# Altium PCB MCU-AD-20130721.PcbDoc
Units mil, origin at the board's own origin, x right, y up, seen from the top; angles counter-clockwise.
Board outline 3680 x 2640 mil, 2 copper layers (Top Layer, Bottom Layer); 104 components, 83 nets, 414 pads, 46 vias.
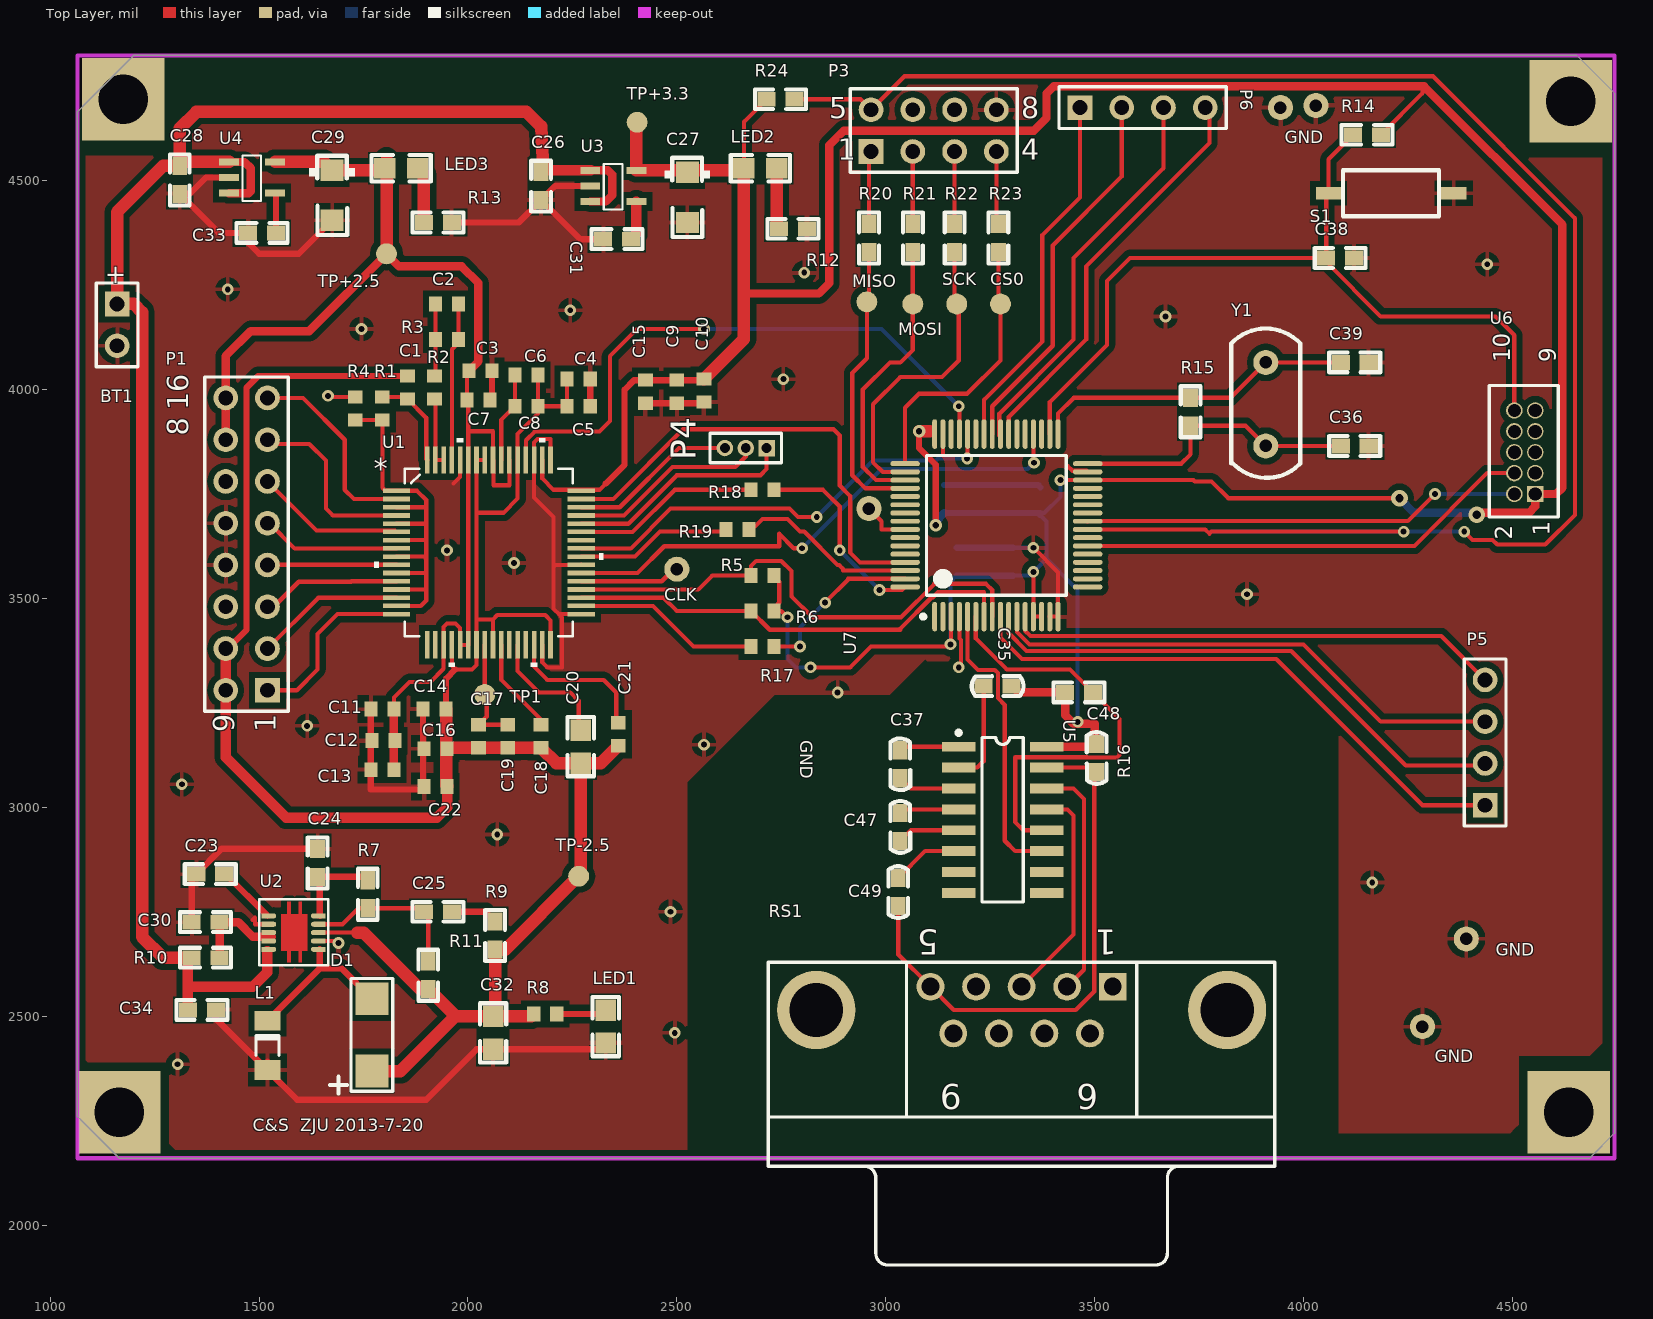
[diagram p0: Top Layer view]
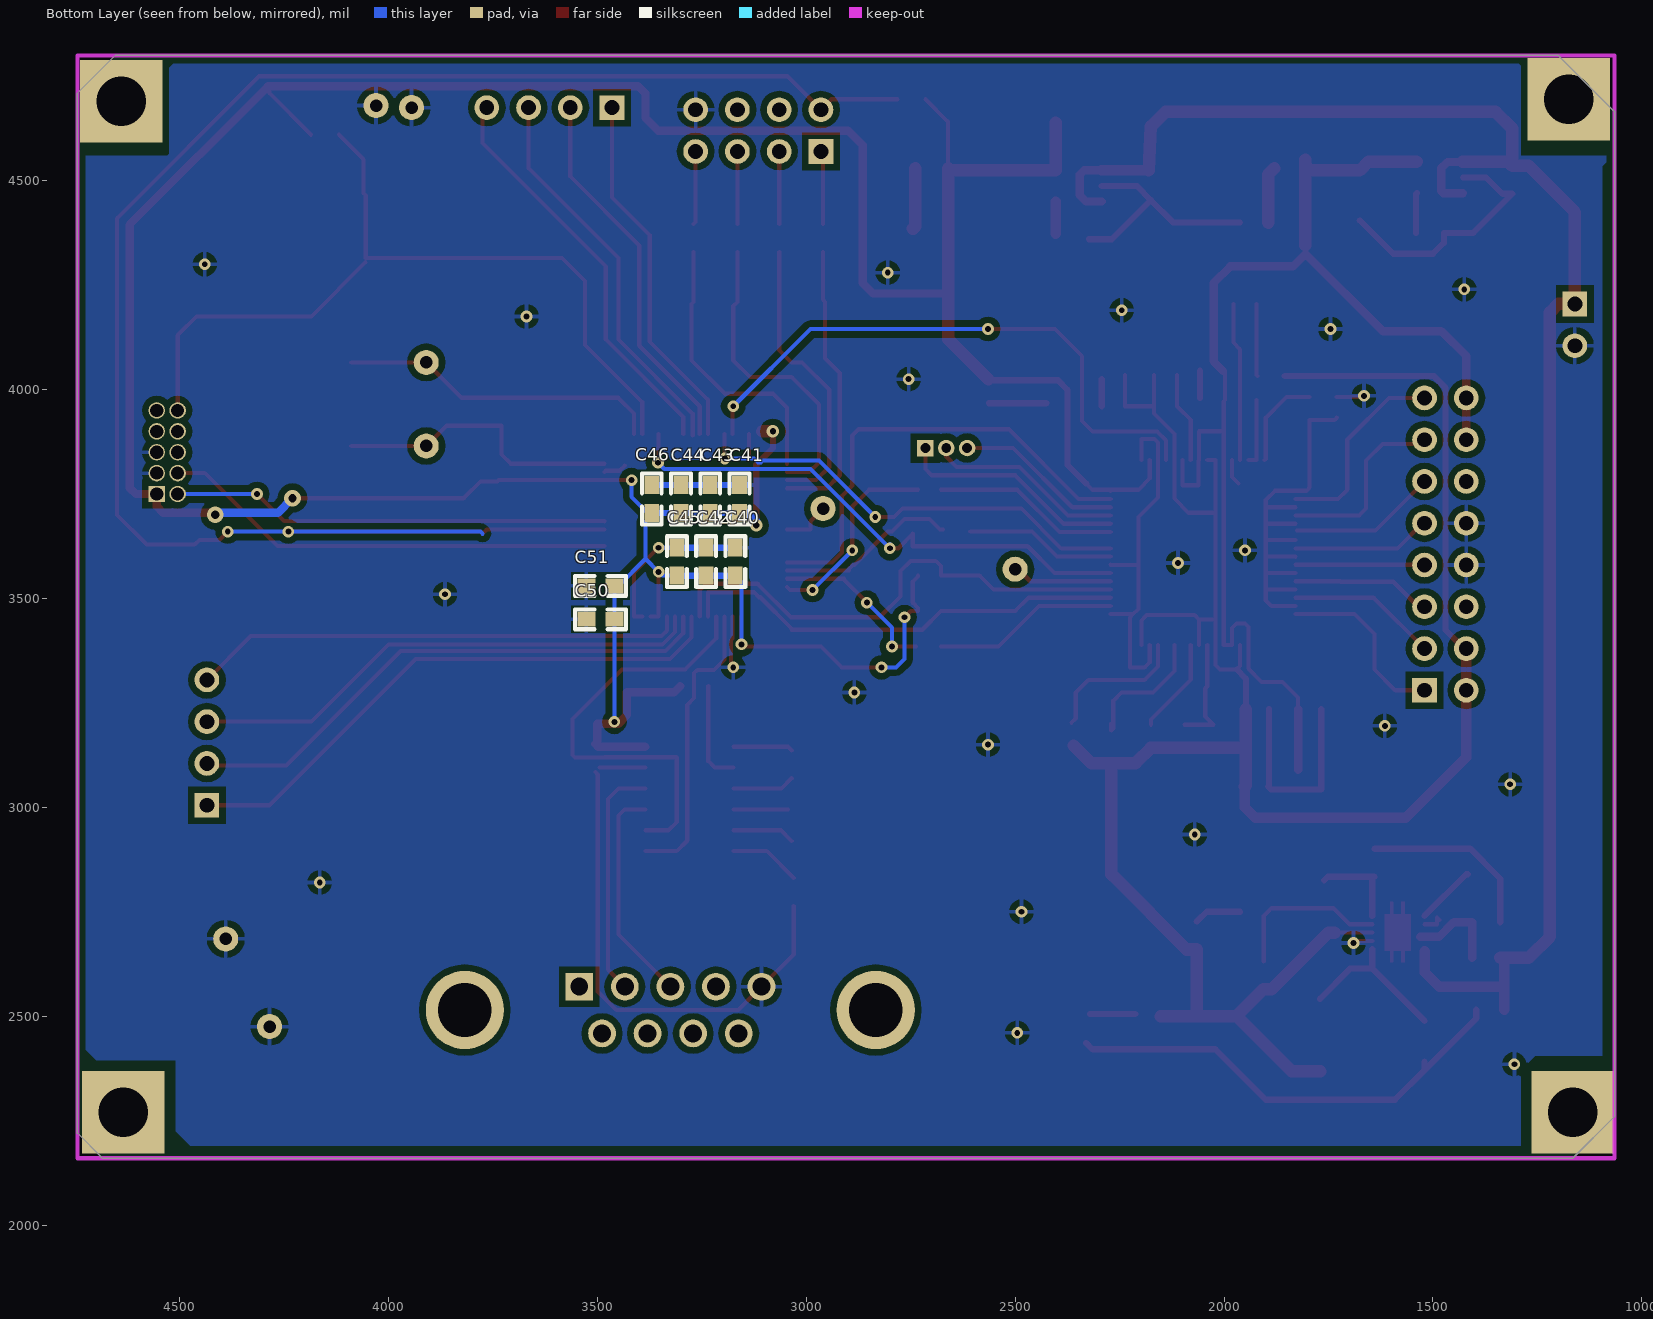
[diagram p1: Bottom Layer view, seen from below]

## Layer stack, top to bottom
Top Layer: signal copper 1.4
Dielectric: dielectric 12.6, FR-4, Dk 4.8
Bottom Layer: signal copper 1.4

## Board outline
1165,2160 1065,2260 1065,4665 1200,4800 4655,4800 4745,4710 4745,2220 4685,2160

## Design rules (kind name [scope] priority, off if disabled: settings)
Clearance [All] p1: gap=6
HoleSize [All] p1: absolutevalues=TRUE maxlimit=200 minlimit=1 maxpercent=80.000 minpercent=20.000
MinimumSolderMaskSliver [All] p1: minsoldermaskwidth=0
PolygonConnect [All] p1: connectstyle=Relief reliefconductorwidth=10 reliefentries=4 polygonreliefangle="90 Angle"
RoutingVias [All] p1: holewidth=14 width=28 viastyle="Through Hole" minholewidth=10 minwidth=20 maxholewidth=30 maxwidth=60
SilkToSilkClearance [All] p1: silktosilkclearance=6
SilkscreenOverComponentPads [All] p1: minsilkscreentomaskgap=0
SolderMaskExpansion [All] p1: expansion=4
Width [All] p1: maxlimit=60 minlimit=8 preferedwidth=10 minimp=50.000000 maximp=50.000000 favimp=50.000000
24 further rules are at their usual default settings.

## Classes and differential pairs
component class AD: C1 C2 C3 C4 C5 C6 C7 C8 C9 C10 C11 C12 C13 C14 C15 C16 C17 C18 C19 C20 C21 C22 P1 P4 R1 R2 R3 R4 R5 R6 TP1 U1
component class MCU: BT1 C23 C24 C25 C26 C27 C28 C29 C30 C31 C32 C33 C34 C35 C36 C37 C38 C39 C40 C41 C42 C43 C44 C45 C46 C47 C48 C49 C50 C51 CS0 D1 L1 LED1 LED2 LED3 P3 P5 P6 R7 R8 R9 R10 R11 R12 R13 R14 R15 R16 R17 R18 R19 R20 R21 R22 R23 R24 RS1 S1 TP+2.5 TP+3.3 TP-2.5 U2 U3 U4 U5 U6 U7 Y1

## Components (designator, comment, footprint, x,y, rotation, side; value= is the part's Value field where it differs from the comment)
BT1 "Battery" BAT-2 1160,4155 r270 top
C1 "Cap" 1608[0603] 1855,4005 r90 top
C2 "Cap" 1608[0603] 1950,4205 r180 top
C3 "Cap" 1608[0603] 2030,4045 r0 top
C4 "Cap" 1608[0603] 2265,4025 r0 top
C5 "Cap" 1608[0603] 2265,3960 r0 top
C6 "Cap" 1608[0603] 2140,4035 r0 top
C7 "Cap" 1608[0603] 2025,3975 r0 top
C8 "Cap" 1608[0603] 2140,3960 r0 top
C9 "Cap" 1608[0603] 2500,3995 r270 top
C10 "Cap" 1608[0603] 2565,3997.44 r270 top
C11 "Cap" 1608[0603] 1795,3235 r0 top
C12 "Cap" 1608[0603] 1797.44,3160 r0 top
C13 "Cap" 1608[0603] 1795,3090 r0 top
C14 "Cap" 1608[0603] 1920,3235 r0 top
C15 "Cap" 1608[0603] 2425,3995 r270 top
C16 "Cap" 1608[0603] 1922.44,3140 r0 top
C17 "Cap" 1608[0603] 2025,3170 r90 top
C18 "Cap" 1608[0603] 2175,3170 r90 top
C19 "Cap" 1608[0603] 2095,3170 r90 top
C20 "Cap" 0805 2270,3145 r90 top
C21 "Cap" 1608[0603] 2360,3175 r90 top
C22 "Cap" 1608[0603] 1922.44,3050 r0 top
C23 "4.7nF" 0603 1385,2840 r0 top
C24 "0.22uF" 0603 1640,2865 r270 top
C25 "10pF" 0603 1930,2750 r0 top
C26 "0.1uF" 0603 2175,4485 r270 top
C27 "10uF" CAP-A 2525,4520 r270 top
C28 "0.1uF" 0603 1310,4500 r270 top
C29 "10uF" CAP-A 1675,4525 r270 top
C30 "0.1uF" 0603 1370,2725 r180 top
C31 "0.1uF" 0603 2355,4360 r180 top
C32 "22uF" 0805 2060,2460 r90 top
C33 "0.1uF" 0603 1505,4375 r180 top
C34 "10uF" 0603 1365,2515 r0 top
C35 "CAP" 0603_CAP 3270,3290 r0 top
C36 "CAP" 0603 4125,3865 r0 top
C37 "CAP" 0603_CAP 3035,3105 r90 top
C38 "CAP" 0603 4090,4315 r0 top
C39 "CAP" 0603 4125,4065 r0 top
C40 "CAP" 0603 3170,3590 r90 bottom
C41 "CAP" 0603 3160,3740 r90 bottom
C42 "CAP" 0603 3240,3590 r90 bottom
C43 "CAP" 0603 3230,3740 r90 bottom
C44 "CAP" 0603 3300,3740 r90 bottom
C45 "CAP" 0603 3310,3590 r90 bottom
C46 "CAP" 0603 3370,3740 r90 bottom
C47 "CAP" 0603_CAP 3035,2955 r90 top
C48 "CAP" 0603_CAP 3505,3120 r90 top
C49 "CAP" 0603_CAP 3030,2795 r270 top
C50 "CAP" 0603 3495,3450 r0 bottom
C51 "CAP" 0603 3495,3530 r0 bottom
CS0 "Test_Point" TP_PAD 3275,4205 r90 top (schematic designator TP6)
D1 "SL02（小信号肖特基二极管）" Diode_NOMAL 1770,2455 r90 top
L1 "Inductor" INDC3216-1206 1520,2430 r270 top
LED1 "LED0" 0805 2330,2475 r90 top
LED2 "Green" 0805 2700,4530 r0 top
LED3 "Green" 0805 1840,4530 r0 top
MISO "Test_Point" TP_PAD 2955,4210 r90 top (schematic designator TP3)
MOSI "Test_Point" TP_PAD 3065,4205 r90 top (schematic designator TP4)
P1 "P-220" HDR2X8_CEN 1520,3280 r90 top
P3 "Header 4X2A" HDR2X4_CEN 2965,4570 r0 top
P4 "MHDR1X3" MHDR1X3 2715,3860 r180 top
P5 "Header 4" HDR1X4 4435,3005 r90 top
P6 "Header 4" HDR1X4 3465,4675 r0 top
R1 "Res1" 1608[0603] 1795,3955 r90 top
R2 "Res1" 1608[0603] 1920,4005 r90 top
R3 "Res1" 1608[0603] 1950,4120 r180 top
R4 "Res1" 1608[0603] 1730,3955 r270 top
R5 "Res1" 1608[0603] 2705,3555 r0 top
R6 "Res1" 1608[0603] 2705,3470 r0 top
R7 "Res2" 0603 1760,2790 r270 top
R8 "Res1" 1608[0603] 2185,2505 r0 top
R9 "Res2" 0603 2065,2695 r90 top
R10 "Res2" 0603 1370,2640 r180 top
R11 "Res2" 0603 1905,2600 r90 top
R12 "Res2" 0603 2780,4385 r0 top
R13 "Res2" 0603 1930,4400 r0 top
R14 "RES" 0603 4150,4610 r180 top
R15 "RES" 0603 3730,3945 r270 top
R16 "10K" 0603 3465,3275 r0 top
R17 "Res1" 1608[0603] 2705,3385 r0 top
R18 "Res1" 1608[0603] 2705,3760 r0 top
R19 "Res1" 1608[0603] 2645,3665 r0 top
R20 "RES" 0603 2960,4365 r90 top
R21 "RES" 0603 3065,4365 r90 top
R22 "RES" 0603 3165,4365 r90 top
R23 "RES" 0603 3270,4365 r90 top
R24 "RES" 0603 2750,4695 r0 top
RS1 "RS232" RS232 3305,2255 r270 top
S1 "RESET" button 4210,4470 r180 top
SCK "Test_Point" TP_PAD 3170,4205 r90 top (schematic designator TP5)
TP1 "Test_Point" TP_PAD 2040,3270 r90 top
TP+2.5 "Test_Point" TP_PAD 1805,4325 r90 top
TP+3.3 "Test_Point" TP_PAD 2405,4640 r90 top
TP-2.5 "Test_Point" TP_PAD 2265,2835 r90 top
U1 "ADS1198_PAG_64" PAG64 2050,3610 r0 top
U2 "tps63700" QFN10 1520,2660 r90 top
U3 "SPX3819_3.3v" SOT-23-G5 2340,4490 r0 top
U4 "SPX3819_2.5v" SOT-23-G5 1475,4510 r0 top
U5 "SP232A" D016 3280,2970 r270 top
U6 "SWD CONNECTOR" "SWD CONNECTOR" 4550,3765 r90 top
U7 "K15-64pin" LQFP64_N 3265,3675 r90 top
Y1 "8M" BCY-W2 3910,3965 r180 top

## Footprints (in the part's own frame and the unit in brackets; to place one, negate y for a bottom-side part, rotate by r counter-clockwise, add the part's x,y. Pads: shape width x height; smd on the part's side, far side on the other; paste and mask are expansions set on the pad)
0603 [mm]
  rect 1.1x0.9 smd: 1(-0.9,0) 2(0.8,0)
  silkscreen extent -1.6,-0.6 1.5,0.6
0603_CAP [mm]
  rect 1.1x0.9 smd: 1(-0.9,0) 2(0.8,0)
  silkscreen extent -1.62,-0.6 1.52,0.6
0805 [mm]
  rect 1.3x1.25 smd: 1(-1,0) 2(1,0)
  silkscreen extent -1.8,-0.8 1.8,0.8
1608[0603] [mm] "Chip Capacitor, Body 1.6x0.8mm, IPC High Density"
  rect 0.8x0.9 smd: 1(-0.7,0) 2(0.7,0)
  body extent -0.87,-0.48 0.87,0.48, height 1.3
BAT-2 [mm] "Multicell Battery; 2 Leads"
  rect 1.5x1.5 hole 0.9: 1(-1.27,0)
  round 1.5 hole 0.9: 2(1.27,0)
  silkscreen extent -2.54,-1.27 2.54,1.27
BCY-W2 [mil]
  round 60 hole 30: 1(0,-100) 2(0,100)
  silkscreen extent -83,-181 83,176
button [mil]
  rect 60x30 smd: 1(150,0) 2(-150,0)
  silkscreen extent -115,-55 115,55
CAP-A [mm]
  rect 1.3x1.4 smd: 1(0,0) 2(3.048,0)
  silkscreen extent -0.89,-1.4 3.94,1.4
D016 [mm]
  rect 0.6x2.05 smd: 1(-4.445,-2.675) 2(-3.175,-2.675) 3(-1.905,-2.675) 4(-0.635,-2.675) 5(0.635,-2.675) 6(1.905,-2.675) 7(3.175,-2.675) 8(4.445,-2.675) 9(4.445,2.675) 10(3.175,2.675) 11(1.905,2.675) 12(0.635,2.675) 13(-0.635,2.675) 14(-1.905,2.675) 15(-3.175,2.675) 16(-4.445,2.675)
  silkscreen extent -5.42,-2.8 5,1.25
Diode_NOMAL [mm]
  rect 2x2 smd: 1(-2.2,-0.002) 2(2.2,-0.002)
  silkscreen extent -3.56,-1.27 3.43,2.54
HDR1X4 [mm] "Connector; Header; 4 Position"
  rect 1.5x1.5 hole 0.9: 1(0,0)
  round 1.5 hole 0.9: 2(2.54,0) 3(5.08,0) 4(7.62,0)
  silkscreen extent -1.27,-1.27 8.89,1.27
HDR2X4_CEN [mm] "Connector; Header; 4x2 Position"
  rect 1.5x1.5 hole 0.9: 1(0,0)
  round 1.5 hole 0.9: 2(2.54,0) 3(5.08,0) 4(7.62,0) 5(0,2.54) 6(2.54,2.54) 7(5.08,2.54) 8(7.62,2.54)
  silkscreen extent -1.27,-1.27 8.89,3.81
HDR2X8_CEN [mm]
  rect 1.5x1.5 hole 0.9: 1(0,0)
  round 1.5 hole 0.9: 2(2.54,0) 3(5.08,0) 4(7.62,0) 5(10.16,0) 6(12.7,0) 7(15.24,0) 8(17.78,0) 9(0,2.54) 10(2.54,2.54) 11(5.08,2.54) 12(7.62,2.54) 13(10.16,2.54) 14(12.7,2.54) 15(15.24,2.54) 16(17.78,2.54)
  silkscreen extent -1.27,-1.27 19.05,3.81
INDC3216-1206 [mm] "3216 Chip; Chip Inductor; Body 3.2 x 1.6 mm (LxW typ)"
  rect 1.2x1.6 smd: 1(-1.5,0) 2(1.5,0)
  silkscreen extent -0.6,-0.7 0.6,0.7
LQFP64_N [mm] "Thin QFP, 64-Leads, Body 10x10mm, Pitch 0.5mm, IPC Medium Density"
  oval 1.8x0.3 smd: 1(-5.55,3.75) 2(-5.55,3.25) 3(-5.55,2.75) 4(-5.55,2.25) 5(-5.55,1.75) 6(-5.55,1.25) 7(-5.55,0.75) 8(-5.55,0.25) 9(-5.55,-0.25) 10(-5.55,-0.75) 11(-5.55,-1.25) 12(-5.55,-1.75) 13(-5.55,-2.25) 14(-5.55,-2.75) 15(-5.55,-3.25) 16(-5.55,-3.75) 33(5.55,-3.75) 34(5.55,-3.25) 35(5.55,-2.75) 36(5.55,-2.25) 37(5.55,-1.75) 38(5.55,-1.25) 39(5.55,-0.75) 40(5.55,-0.25) 41(5.55,0.25) 42(5.55,0.75) 43(5.55,1.25) 44(5.55,1.75) 45(5.55,2.25) 46(5.55,2.75) 47(5.55,3.25) 48(5.55,3.75)
  oval 0.3x1.8 smd: 17(-3.75,-5.55) 18(-3.25,-5.55) 19(-2.75,-5.55) 20(-2.25,-5.55) 21(-1.75,-5.55) 22(-1.25,-5.55) 23(-0.75,-5.55) 24(-0.25,-5.55) 25(0.25,-5.55) 26(0.75,-5.55) 27(1.25,-5.55) 28(1.75,-5.55) 29(2.25,-5.55) 30(2.75,-5.55) 31(3.25,-5.55) 32(3.75,-5.55) 49(3.75,5.55) 50(3.25,5.55) 51(2.75,5.55) 52(2.25,5.55) 53(1.75,5.55) 54(1.25,5.55) 55(0.75,5.55) 56(0.25,5.55) 57(-0.25,5.55) 58(-0.75,5.55) 59(-1.25,5.55) 60(-1.75,5.55) 61(-2.25,5.55) 62(-2.75,5.55) 63(-3.25,5.55) 64(-3.75,5.55)
  silkscreen extent -5.67,-4.25 4.25,4.57, body extent -5,-5 5,5, height 1.6
MHDR1X3 [mm] "Connector; Header; 3 Position"
  rect 1x1 hole 0.6: 1(0,0)
  round 1 hole 0.6: 2(1.27,0) 3(2.54,0)
  silkscreen extent -0.9,-0.9 3.44,0.9
PAG64 [mil]
  rect 65.5x11 smd: 1(-221.25,147.64) 2(-221.25,127.95) 3(-221.25,108.27) 4(-221.25,88.58) 5(-221.25,68.9) 6(-221.25,49.21) 7(-221.25,29.53) 8(-221.25,9.84) 9(-221.25,-9.84) 10(-221.25,-29.53) 11(-221.25,-49.21) 12(-221.25,-68.9) 13(-221.25,-88.58) 14(-221.25,-108.27) 15(-221.25,-127.95) 16(-221.25,-147.64) 33(221.25,-147.64) 34(221.25,-127.95) 35(221.25,-108.27) 36(221.25,-88.58) 37(221.25,-68.9) 38(221.25,-49.21) 39(221.25,-29.53) 40(221.25,-9.84) 41(221.25,9.84) 42(221.25,29.53) 43(221.25,49.21) 44(221.25,68.9) 45(221.25,88.58) 46(221.25,108.27) 47(221.25,127.95) 48(221.25,147.64)
  rect 11x65.5 smd: 17(-147.64,-221.25) 18(-127.95,-221.25) 19(-108.27,-221.25) 20(-88.58,-221.25) 21(-68.9,-221.25) 22(-49.21,-221.25) 23(-29.53,-221.25) 24(-9.84,-221.25) 25(9.84,-221.25) 26(29.53,-221.25) 27(49.21,-221.25) 28(68.9,-221.25) 29(88.58,-221.25) 30(108.27,-221.25) 31(127.95,-221.25) 32(147.64,-221.25) 49(147.64,221.25) 50(127.95,221.25) 51(108.27,221.25) 52(88.58,221.25) 53(68.9,221.25) 54(49.21,221.25) 55(29.53,221.25) 56(9.84,221.25) 57(-9.84,221.25) 58(-29.53,221.25) 59(-49.21,221.25) 60(-68.9,221.25) 61(-88.58,221.25) 62(-108.27,221.25) 63(-127.95,221.25) 64(-147.64,221.25)
  silkscreen extent -274,-274 274,274
QFN10 [mil]
  round 11.98 smd mask+0: 1(80,-15) 2(60,-15) 3(40,-15) 4(20,-15) 5(0,-15) 6(0,-110) 7(20,-110) 8(40,-110) 9(60,-110) 10(80,-110)
  rect 12x28 smd mask+0: 1(80,0) 2(60,0) 3(40,0) 4(20,0) 5(0,0) 6(0,-125) 7(20,-125) 8(40,-125) 9(60,-125) 10(80,-125)
  Top Layer region: 78.5,-83 114,-83 114,-74 78.5,-74
  Top Layer region: -31.5,-83 5,-83 5,-74 -31.5,-74
  Top Layer region: -4,-96 84,-96 84,-32 -4,-32
  Top Layer region: 83,-56 114,-56 114,-47 83,-47
  Top Layer region: -31.5,-56 5,-56 5,-47 -31.5,-47
  silkscreen extent -38,-145 120,20
RS232 [mm]
  rect 1.69x1.69 hole 1.09: 1(-8.014,6.059)
  round 1.69 hole 1.09: 2(-8.014,3.289) 3(-8.014,0.519) 4(-8.014,-2.251) 5(-8.014,-5.021) 6(-5.174,4.674) 7(-5.174,1.904) 8(-5.174,-0.866) 9(-5.174,-3.636)
  round 4.76 hole 3.26: 10(-6.594,13.014) 11(-6.594,-11.976)
  silkscreen extent -9.49,-14.88 8.91,15.92
SOT-23-G5 [mil]
  rect 47.24x16.9 smd: 1(-47,35) 2(-47,-2.4) 3(-47,-39.8) 4(63.24,-39.8) 5(63.24,35)
  silkscreen extent -15,-59 30,50
"SWD CONNECTOR" [mm]
  rect 1x1 hole 0.8: 1(-0.381,-0.127)
  round 1 hole 0.8: 2(-0.381,1.143) 3(0.889,-0.127) 4(0.889,1.143) 5(2.159,-0.127) 6(2.159,1.143) 7(3.429,-0.127) 8(3.429,1.143) 9(4.699,-0.127) 10(4.699,1.143)
  silkscreen extent -1.78,-1.52 6.22,2.67
TP_PAD [mil] "For Test Point"
  round 50 smd: 0(0,0)

## Part data
BT1: "Multicell Battery"
C1 C2 C3 C4 C5 C6 C7 C8 C9 C10 C11 C12 C13 C14 C15 C16 C17 C18 C19 C20 C21 C22: "Capacitor"
C23 C24 C25 C26 C28 C30 C31 C32 C33 C34: library part CAP
C27 C29: library part "CAP POL3"
D1: library part Diode, "Default Diode"
LED1: "Typical INFRARED GaAs LED"
LED2 LED3: library part LED
P1: library part "Header 8X2A", "Header, 8-Pin, Dual row"
P3: "Header, 4-Pin, Dual row"
P4: "Header, 3-Pin"
P5 P6: "Header, 4-Pin"
R1 R2 R3 R4 R5 R6 R7 R8 R9 R10 R11 R12 R13 R17 R18 R19: "Resistor"
R16: library part RES
S1: library part SW-PB
U1: "Imported"
U3 U4: library part SPX3819
Y1: library part XTAL_2

## Free pads (board coordinates)
  round 60 hole 30: 0(4285,2475) 1(4390,2685) 2(3945,4675) 3(4030,4680) 4(2500,3570) 5(2960,3715)
  rect 196.85x196.85 hole 118.11: 2(1165,2270) 2(1175,4695) 2(4635,2270) 2(4640,4690)

## Via types
v1: diameter 28, hole 14, Top Layer to Bottom Layer, 42 vias
v2: diameter 30, hole 15, Top Layer to Bottom Layer, 2 vias
v3: diameter 40, hole 20, Top Layer to Bottom Layer, 2 vias

## Nets (pads, with @x,y where several pads share a name; then routed paths per layer and width w, separated by ;. In a path a pad name is that pad's centre, name@x,y a point inside that pad or via, vN(x,y) a via of type N, cw(c..) or ccw(c..) an arc to the next point about the centre after c; other vN are vias at no path point)
+2.5V: C3.1 C7.1 C11.2 C12.2 C13.2 C29.1 LED3.1 P1.15 P1.16 TP+2.5.0 U1.19 U1.21 U1.22 U1.54 U1.56 U1.59 U4.5 | length 3108.2
  Top Layer w10: C11.2 1822.56,3262.56 1860,3300 1910,3300 1941.73,3331.73 U1.19 1941.73,3431.73 1950,3440 1970,3440 1981.1,3428.9 U1.21 U1.22 U1.59 2000.79,3901.45 ; C3.1@1997.44,4040 C7.1 2000.79,3971.65 2000.79,3901.45 ; U1.54 2099.21,3770.79 2060.79,3770.79 2060.79,3830.31 U1.56 2059.84,3900.16 2002.08,3900.16 2000.79,3901.45
  Top Layer w20: P1.15 P1.16 1420,4080 1480,4140 1620,4140 TP+2.5.0 1835,4295 1985,4295 2025,4255 2025,4067.56 C3.1 ; C13.2 C11.2
  Top Layer w30: U4.5 1655,4545 C29.1 1795.63,4525 LED3.1 1800,4530.63 LED3.1@1800,4525 ; TP+2.5.0@1805,4345 LED3.1@1805,4550.63
+3.3V: C9.1 C10.1 C15.1 C27.1 C35.2 C40.1 C41.1 C42.1 C43.1 C44.1 C45.1 C46.1 C48.2 C50.1 C51.1 LED2.1 R5.2 R6.2 R14.1 R16.1 R24.1 TP+3.3.0 U1.48 U1.50 U3.5 U5.16 U6.1 U7.3 U7.13 U7.14 U7.30 U7.48 | length 9233.3
  Top Layer w10: U1.50 2177.95,3787.05 2205,3760 U1.48@2268.89,3760 ; U1.48 U1.48@2268.89,3760 ; 2330,3775 2315,3760 U1.48@2268.89,3760 ; LED2.1 2660.63,4641.06 R24.1 ; R5.2 2732.56,3552.56 2745,3540.12 2745,3489.88 2732.56,3477.44 R6.2 2750,3470 v1(2765,3455) ; v1(2820,3335) 2915,3335 2965,3385 3150,3385 v1(3155,3390) 3156.73,3391.73 U7.3 ; v1(3353.58,3563.58) U7.13 U7.14 ; v1(3418.27,3783.27) U7.30 3736.73,3783.27 3740,3780 3780,3780 3820,3740 v3(4230,3740) ; R14.1 4285,4709.57 4285,4722
  Top Layer w15: 2330,3775 2375,3820 2375,4000 2397.56,4022.56 C15.1 C9.1 2562.56,4022.56 C10.1 ; v2(3080,3900) 3080,3860 3120,3820 v2(3120,3675)
  Top Layer w20: 2660.63,4230 2840,4230 2865,4255 2865,4585 2900,4620 3355,4620 3385,4650 3385,4709 3402,4726 4289,4726 4620,4395 4620,3765 4605,3750 U6.1 4555,3720 4540,3705 4420,3705 v3(4415,3700) ; C35.2 3316.5,3275 R16.1 3429.57,3220.43 3450,3200 3500.43,3200 3500.43,3156.06 C48.2 3498.5,3145 U5.16
  Top Layer w30: TP+3.3.0@2403.24,4638.24 U3.5 LED2.1@2655.63,4525 ; C10.1 2660.63,4120.63 2660.63,4230 LED2.1 ; v2(3080,3900) 3105,3900
  Bottom Layer w10: v1(2765,3455) 2765,3355 2785,3335 v1(2820,3335) ; v1(3155,3390) 3155,3539.57 C40.1 ; C45.1@3305,3554.57 C45.1 3344.57,3554.57 v1(3353.58,3563.58) 3385,3595 ; C46.1@3365,3704.57 C46.1 3379.57,3704.57 3418.27,3743.27 v1(3418.27,3783.27) ; C46.1@3370,3699.57 3385,3684.57 3385,3595 ; v1(3459.57,3204.57) C50.1 C51.1 3450,3530 3385,3595
  Bottom Layer w15: 3140,3704.57 3365,3704.57 3370,3699.57 C46.1 ; C40.1 C42.1 C45.1@3305,3554.57
  Bottom Layer w20: v2(3120,3675) 3120,3684.57 3140,3704.57 ; v3(4230,3740) 4265,3705 4410,3705 v3(4415,3700)
-2.5V: C1.2 C4.1 C5.1 C6.2 C8.2 C14.2 C16.2 C17.1 C18.1 C19.1 C20.1 C21.1 C22.2 C32.2 D1.1 P1.9 P1.10 R8.1 R9.1 R11.1 TP-2.5.0 U1.20 U1.23 U1.25 U1.32 U1.53 U1.57 U1.58 U2.8 | length 5742.2
  Top Layer w10: U2.8@1645,2700 1735,2700 ; U1.20 1961.42,3338.58 1970,3330 2010,3330 2020.47,3340.47 U1.23 2020.47,3450 ; 2025.47,3705 2085,3705 2118.9,3738.9 U1.53 2118.9,3893.9 2167.56,3942.56 C8.2 ; U1.57 U1.58 2020.47,3450 ; U1.25 2059.84,3449.84 ; C6.2 C8.2 ; U1.32 2197.64,3447.36 2185,3460 2070,3460 2059.84,3449.84 ; C4.1@2237.44,4035 C5.1 C8.2 ; 2020.47,3450 2020.63,3449.84 2059.84,3449.84
  Top Layer w15: P1.10 1425,3380 1470,3425 1470,4005 1497.56,4032.56 C1.2 ; C14.2 1947.56,3307.56 1970,3330
  Top Layer w25: P1.10 P1.9 1420,3120 1565,2975 1925,2975 1950,3000 C22.2
  Top Layer w30: 1735,2700 1750,2700 1885.43,2564.57 R11.1 1969.57,2500 ; D1.1 1837.95,2368.39 1969.57,2500 ; C14.2 1947.56,3052.44 C22.2 ; C16.2 1952.44,3142.44 C17.1 C19.1 C18.1 2211.81,3105.63 C20.1 ; C32.2 R8.1@2151.81,2499.37 ; C21.1 2318.19,3105.63 C20.1 ; 1969.57,2500 2059.37,2500 2065,2505.63 R9.1 2089.57,2659.57 TP-2.5.0 2270,2840 C20.1
CLK: pad.4 U1.37 | length 240.6
  Top Layer w10: U1.37 2463.9,3541.1 pad.4@2497.8,3575
CLKSEL: U1.52 U7.45 | length 1428.6
  Top Layer w10: U1.52 2138.58,3878.58 2160,3900 2315,3900 2340,3925 2340,4080 2405,4145 v1(2565,4145) ; v1(3175,3960) 3176.42,3958.58 U7.45
  Bottom Layer w10: v1(2565,4145) 2990,4145 v1(3175,3960)
D\R\D\Y\: U1.47 U7.61 | length 1125.8
  Top Layer w10: U1.47 2347.95,3737.95 2515,3905 2875,3905 2890,3890 2890,3770 2915,3745 2915,3610 2938.58,3586.42 U7.61
DIN: R17.1 U1.34 | length 446.4
  Top Layer w10: U1.34 2442.95,3482.05 2540,3385 R17.1
EXTAL: C36.1 R15.2 U7.32 Y1.2 | length 703.9
  Top Layer w10: U7.32 3707.64,3822.64 3730,3845 R15.2 3861.5,3913.5 Y1.2 C36.1
GND: BT1.2 C3.2 C4.2 C5.2 C7.2 C9.2 C10.2 C11.1 C12.1 C13.1 C14.1 C15.2 C16.1 C22.1 C23.1 C24.1 C26.2 C27.2 C28.2 C29.2 C30.2 C31.2 C32.1 C33.2 C34.2 C36.2 C38.2 C39.2 C40.2 C41.2 C42.2 C43.2 C44.2 C45.2 C46.2 C48.1 C49.2 C50.2 C51.2 L1.2 LED1.1 P1.12 P1.13 P3.8 pad.0 pad.1 pad.2@3945,4675 pad.3 R4.1 R12.2 R13.2 RS1.5 S1.2 U1.31 U1.33 U1.39 U1.49 U1.51 U1.60 U2.2 U2.7 U3.2 U4.2 U5.15 U6.3 U6.5 U7.4 U7.15 U7.16 U7.31 U7.47 | length 6731.9
  Top Layer w10: 1484.47,2730.02 1490,2735.56 1490,2720 U2.2@1520,2720 ; U2.7@1645,2680 1685,2680 v1(1690,2675) ; v1@1667.44,3982.56 R4.1 ; 1965,3775 1981.1,3791.1 U1.60 ; U1.31 2177.95,3347.05 2190,3335 2225,3335 2225,3455 2217.64,3462.36 ; U1.49 2197.64,3881.36 2166.36,3881.36 2158.27,3873.27 U1.51 2158.27,3741.73 2205,3695 2205,3575 ; U1.33 2217.64,3462.36 ; U1.39 2270.78,3580 2210,3580 2205,3575 ; C49.2 3030,2647.83 RS1.5 3162.83,2515 3455,2515 3499.28,2559.28 3499.28,3078.84 C48.1 ; 3137.05,3842.66 U7.47 ; v1(3175,3335) 3180,3340 3180,3400.36 3176.42,3403.94 U7.4 ; v1(3353.5,3621.5) 3412.64,3562.36 U7.16 U7.15 ; U5.15 C48.1@3494.57,3095 ; 3434.49,3818.22 3446.97,3805.73 3480.72,3805.73 U7.31 ; 2205,3575 2205,3475 2217.64,3462.36
  Top Layer w15: C30.2 1338.5,2828.94 C23.1 1410,2900.43 C24.1 ; C34.2 1396.5,2494.45 L1.2 ; U4.2 1372.6,4507.6 1333.5,4468.5 C28.2 1403.5,4375 C33.2 1473.5,4351.5 1500,4325 1595,4325 C29.2 ; L1.2@1520,2391.5 L1.2 ; C11.1 C13.1 1767.44,3042.44 1887.32,3042.44 C22.1 ; C22.1@1892.44,3052.44 C14.1 ; R13.2 2121.5,4400 C26.2 ; C7.2@2057.56,3980 C3.2 ; C5.2 C4.2 ; U3.2 2209.09,4487.6 C26.2 ; C31.2 2268.5,4360 C26.2 ; LED1.1 2315,2420.63 C32.1 2020.63,2420.63 1900,2300 1590.94,2300 L1.2 ; C15.2 C9.2 C10.2@2562.56,3967.44
  Bottom Layer w10: C45.2@3305,3621.5 v1(3353.5,3621.5)
  Bottom Layer w15: 3140,3771.5 3365,3771.5 C46.2@3370,3766.5 ; C40.2 C45.2@3305,3621.5
  other v1: 1305,2385 2495,2460 2485,2750 4165,2820 2070,2935 1315,3055 2565,3150 1615,3195 2885,3275 3865,3510 2110,3585 1950,3615 1665,3985 2755,4025 1745,4145 3670,4175 2245,4190 1425,4240 2805,4280 4440,4300
GPIO2: P4.1 U1.44 | length 548.1
  Top Layer w10: U1.44 2383.9,3678.9 2500,3795 2700,3795 2715,3810 P4.1
GPIO3: P4.2 U1.45 | length 472.3
  Top Layer w10: U1.45 2373.58,3698.58 2490,3815 2640,3815 2665,3840 P4.2
GPIO4: P4.3 U1.46 | length 402.5
  Top Layer w10: U1.46 2363.27,3718.27 2505,3860 P4.3
IN1P: P1.1 U1.16 | length 434.1
  Top Layer w10: P1.1 1590,3280 1640,3330 1640,3415 1687.36,3462.36 U1.16
IN2P: P1.2 U1.14 | length 359.2
  Top Layer w10: P1.2 1641.73,3501.73 U1.14
IN3P: P1.3 U1.12 | length 334.1
  Top Layer w10: P1.3 1535,3480 1595,3540 1720,3540 1721.1,3541.1 U1.12
IN4P: P1.4 U1.10 | length 308.3
  Top Layer w10: P1.4@1520.47,3580.47 U1.10
IN5P: P1.5 U1.8 | length 333.7
  Top Layer w10: P1.5 1525,3680 1585.16,3619.84 U1.8
IN6P: P1.6 U1.6 | length 354.3
  Top Layer w10: P1.6 1637.6,3662.4 U1.6@1825.57,3662.4
IN7P: P1.7 U1.4 | length 451.3
  Top Layer w10: P1.7 1530,3870 1620,3870 1660,3830 1660,3715 1676.42,3698.58 U1.4
IN8P: P1.8 U1.2 | length 479.3
  Top Layer w10: P1.8 1605,3980 1705,3880 1705,3760 1727.05,3737.95 U1.2
NetC1_1: C1.1 R1.2 U1.64 | length 220.7
  Top Layer w10: R1.2 C1.1@1849.88,3982.56 ; C1.1 1900,3932.44 1900,3833.61 U1.64
NetC2_1: C2.1 R3.1 U1.61 | length 380.4
  Top Layer w10: U1.61 1961.42,4096.42 1977.56,4112.56 R3.1 C2.1
NetC2_2: C2.2 R2.2 R3.2 | length 173.5
  Top Layer w10: R2.2 1922.44,4035 R3.2 C2.2
NetC6_1: C6.1 C8.1 U1.55 | length 217.4
  Top Layer w10: U1.55 2079.53,3927.09 C8.1 C6.1
NetC18_2: C18.2 U1.26 | length 230.7
  Top Layer w10: U1.26 2079.53,3305.47 2175,3210 C18.2
NetC20_2: C20.2 U1.28 | length 326.5
  Top Layer w10: U1.28 2118.9,3326.1 2170,3275 2245,3275 2265,3255 2265,3189.37 C20.2 C20.2@2270,3200
NetC21_2: C21.2 U1.30 | length 350.9
  Top Layer w10: U1.30 2158.27,3336.73 2190,3305 2325,3305 2355,3275 2355,3212.56 C21.2@2365,3202.56
NetC23_2: C23.2 U2.1 | length 144.9
  Top Layer w15: C23.2 1420,2840 U2.1@1520,2740
NetC24_2: C24.2 R7.1 U2.10 | length 218.9
  Top Layer w15: U2.10@1645,2740 1645,2828.5 C24.2 1751.93,2833.5 R7.1
NetC25_1: C25.1 R7.2 R11.2 U2.9 | length 391.9
  Top Layer w10: U2.9@1645,2720 1700,2720 1738.5,2758.5 R7.2 1886.06,2758.5 C25.1 1905,2739.57 R11.2
NetC25_2: C25.2 R9.2 | length 113.2
  Top Layer w15: C25.2 2041.5,2750 R9.2
NetC30_1: C30.1 R10.1 U2.3 U2.4 | length 224.1
  Top Layer w20: R10.1 C30.1 1450,2725 1485,2690 1530,2690
NetC31_1: C31.1 U3.4 | length 77.4
  Top Layer w25: C31.1@2403.24,4372.8 U3.4
NetC33_1: C33.1 U4.4 | length 96.1
  Top Layer w15: U4.4 1540.43,4468 C33.1
NetC35_1: C35.1 U5.2 | length 245.8
  Top Layer w10: U5.2 3219.13,3095 3234.57,3110.43 C35.1
NetC37_1: C37.1 U5.3 | length 149.9
  Top Layer w10: C37.1 3059.57,3045 U5.3
NetC37_2: C37.2 U5.1 | length 143.2
  Top Layer w10: C37.2 3043.5,3145 U5.1
NetC47_1: C47.1 U5.5 | length 150.2
  Top Layer w10: C47.1 3060.43,2945 U5.5
NetC47_2: C47.2 U5.4 | length 131.2
  Top Layer w10: C47.2@3043.5,2995 U5.4
NetC49_1: C49.1 U5.6 | length 171.4
  Top Layer w10: C49.1 3094.57,2895 U5.6
NetD1_2: D1.2 L1.1 U2.6 | length 377.8
  Top Layer w15: L1.1 1645,2614.06 ; U2.6@1645,2660 1645,2614.06 ; D1.2 1697.62,2614.06 1645,2614.06
NetLED1_2: LED1.2 R8.2 | length 108.1
  Top Layer w15: R8.2 LED1.2@2320.63,2505
NetLED2_2: LED2.2 R12.1 | length 147.2
  Top Layer w30: LED2.2 2739.37,4390.2 R12.1
NetLED3_2: LED3.2 R13.1 | length 136.3
  Top Layer w30: LED3.2 1894.57,4514.8 R13.1
NetP3_1: P3.1 R20.2 | length 175.6
  Top Layer w10: R20.2 2960,4565 P3.1
NetP3_2: P3.2 R21.2 | length 173.5
  Top Layer w10: R21.2 P3.2
NetP3_3: P3.3 R22.2 | length 173.5
  Top Layer w10: R22.2 P3.3
NetP3_4: P3.4 R23.2 | length 175.6
  Top Layer w10: P3.4 3265,4401.5 R23.2
NetR1_1: R1.1 R4.2 U1.1 U1.3 U1.5 U1.7 U1.9 U1.11 U1.13 U1.15 | length 1086.6
  Top Layer w10: R4.2@1730,3932.44 1735,3927.44 R1.1 1795,3765 1802.36,3757.64 U1.1 1877.64,3757.64 1900,3735.28 1900,3595 ; U1.15 1887.05,3482.05 1900,3495 1900,3525 ; U1.13 1896.42,3521.42 1900,3525 ; U1.11 1899.21,3560.79 ; U1.7 1899.53,3639.53 ; U1.5 1896.1,3678.9 ; U1.3 1896.73,3718.27 ; U1.9@1828.91,3600 U1.9 1894.84,3600.16 1900,3595 ; 1900,3525 1900,3595
NetR2_1: R2.1 U1.62 U1.63 | length 163.8
  Top Layer w10: R2.1@1922.05,3975.39 U1.63 U1.62
NetR18_1: R18.1 U1.43 | length 447.9
  Top Layer w10: U1.43 2394.21,3659.21 2495,3760 R18.1
NetRS1_2: RS1.2 U5.14 | length 566.3
  Top Layer w10: U5.14 3450,3045 3475,3020 3475,2611.02 RS1.2
NetRS1_3: RS1.3 U5.13 | length 532
  Top Layer w10: RS1.3 3450,2695.08 3450,2980 3435,2995 U5.13
NetU1_41: U1.41 U7.44 | length 1096
  Top Layer w10: U1.41 2389.84,3619.84 2485,3715 2770,3715 2790,3695 v1(2835,3695) ; v1(3195,3835) 3196.1,3836.1 U7.44
  Bottom Layer w10: v1(2835,3695) 2970,3830 3120,3830 3125,3835 v1(3195,3835) ; 3108.37,3826 3116,3826
P\W\D\N\: R6.1 U1.35 U7.7 | length 1090.4
  Top Layer w10: U1.35 2468.27,3501.73 2500,3470 R6.1 2722.44,3425 3035,3425 ; 3035,3427.57 3110.36,3502.93 3112.93,3502.93 3125,3515 3235,3515 3235.47,3514.53 U7.7
PTA2: P3.5 R24.2 U7.24 | length 4444.9
  Top Layer w10: R24.2 2940,4695 P3.5 3045,4750 4310,4750 4650,4410 4650,3700 4579,3629 4464,3629 4453,3640 4405,3640 v1(4385,3660) ; U7.24 3764.84,3665.16 3775,3655 3780,3660 v1(4240,3660)
  Bottom Layer w10: 3775,3655 3780,3660 v1(4240,3660) v1(4385,3660)
PTB16: P6.4 U7.39 | length 984.7
  Top Layer w10: U7.39 3294.53,3934.53 3480,4120 3480,4295 3775,4590 3775,4665 P6.4
PTB17: P6.3 U7.40 | length 947.8
  Top Layer w10: U7.40@3272.06,3890 3272.06,3942.06 3450,4120 3450,4315 3665,4530 P6.3
PTB18: P6.2 U7.41 | length 909.8
  Top Layer w10: U7.41 3255.16,3960.16 3400,4105 3400,4345 3565,4510 P6.2
PTB19: P6.1 U7.42 | length 876.6
  Top Layer w10: U7.42 3235.47,3975.47 3375,4115 3375,4370 3465,4460 P6.1
PTD0: pad.5 U7.57 | length 129.4
  Top Layer w10: pad.5 2982.58,3692.42 ; pad.5@2975,3700 2990.16,3684.84 2990.16,3665.16 U7.57
PTE20: P5.1 U7.9 | length 1376.7
  Top Layer w10: U7.9 3274.84,3406.16 3326,3355 3935,3355 4285,3005 P5.1
PTE21: P5.2 U7.10 | length 1313.4
  Top Layer w10: U7.10 3294.53,3416.86 3337.39,3374 3971,3374 4245,3100 4430,3100 P5.2
PTE22: P5.3 U7.11 | length 1246.5
  Top Layer w10: U7.11 3314.21,3419.8 3344.02,3390 4000,3390 4185,3205 P5.3
PTE23: P5.4 U7.12 | length 1183.6
  Top Layer w10: U7.12 3333.9,3422.75 3346.64,3410 4330,3410 P5.4
R\E\S\E\T\: R5.1 U1.36 U7.8 | length 1220.6
  Top Layer w10: U1.36 2551.42,3521.42 2585,3555 R5.1 2677.44,3577.44 2690,3590 2750,3590 2774.15,3565.85 2774.15,3505 ; 2774.57,3504.57 2774.15,3505 ; U7.8 3255.16,3519.84 3240,3535 3116.42,3535 3036.42,3455 2824.64,3455 2775,3504.64 2775,3505 2774.15,3505
RESET: C38.1 R14.2 S1.1 U6.10 U7.34 | length 1994.6
  Top Layer w10: U7.34 3392.95,3970 3530,4107.05 3530,4260 3585,4315 C38.1 4054.57,4464.57 S1.1 4060,4551.5 R14.2 ; C38.1@4055,4305 4185,4175 4460,4175 4505,4130 U6.10
SCLK: R19.1 U1.40 | length 361
  Top Layer w10: U1.40 2400.16,3600.16 2460,3660 R19.1@2607.44,3660
SPI0_MISO: MISO.0 R20.1 U7.52 | length 690.6
  Top Layer w10: R20.1 2960,4215 MISO.0 2955,4075 2920,4040 2920,3795 2951.42,3763.58 U7.52
SPI0_MOSI: MOSI.0 R21.1 U7.51 | length 693.6
  Top Layer w10: U7.51 2976.73,3783.27 2945,3815 2945,4000 3010,4065 3035,4065 3065,4095 MOSI.0 R21.1
SPI0_PCS0: CS0.0 R23.1 U7.49 | length 663.9
  Top Layer w10: U7.49 3046.5,3956.5 3080,3990 3195,3990 3275,4070 CS0.0 ; CS0.0@3270,4210 R23.1
SPI0_SCK: R22.1 SCK.0 U7.50 | length 737.3
  Top Layer w10: U7.50 2992.95,3802.95 2970,3825.91 2970,3965 3035,4030 3135,4030 3175,4070 3175,4200 SCK.0 3165,4210 R22.1
SPI1_MISO: R18.2 U7.64 | length 477.9
  Top Layer w10: R18.2 2850,3760 2890,3720 v1(2890,3615) ; v1(2985,3520) 3039.13,3520 U7.64
  Bottom Layer w10: v1(2890,3615) v1(2985,3520)
SPI1_MOSI: R17.2 U7.63 | length 409.5
  Top Layer w10: R17.2@2737.56,3385 v1(2795,3385) ; v1(2855,3490) 2912.05,3547.05 ; 2910,3547.05 U7.63
  Bottom Layer w10: v1@2795,3380 2795,3430 v1(2855,3490)
SPI1_SCK: R19.2 U7.62 | length 437.6
  Top Layer w10: R19.2 2680,3665 2705,3690 2765,3690 2795,3660 2805,3660 2884.77,3580.23 2888.67,3580.23 2898.05,3570.86 2898.05,3566.95 2898.27,3566.73 U7.62
START: U1.38 U7.36 | length 1318.9
  Top Layer w10: U1.38 2405.79,3560.79 2470,3625 2745,3625 2745,3655 2780,3620 v1(2800,3620) ; U7.36 3353.58,3826.42 v1(3355,3825)
  Bottom Layer w10: v1@2800,3630 v1(2800,3620) 2990,3810 3340,3810 v1(3355,3825)
SWD_CLK: U6.4 U7.22 | length 1093.7
  Top Layer w10: U7.22 4265.79,3625.79 4440,3800 U6.4
SWD_DIO: U6.2 U7.25 | length 1048.5
  Top Layer w10: U7.25 3483.66,3685 4250,3685 v1(4315,3750)
  Bottom Layer w10: v1(4315,3750) U6.2
UART2_RX: R16.2 U5.12 U7.6 | length 1054.4
  Top Layer w10: U7.6 3215.79,3404.21 3290,3330 3441.5,3330 R16.2 3560,3211.5 3560,3125 3553.84,3118.84 3482.73,3118.84 3481.57,3120 3310,3120 3310,2965 3330,2945 U5.12
UART2_TX: U5.11 U7.5 | length 707.4
  Top Layer w10: U7.5 3196.1,3353.9 3221,3329 3261,3329 3268.84,3321.16 3268.84,3261.28 3285,3245.13 3285,2920 3310,2895 U5.11
V_BAT: BT1.1 C26.1 C28.1 C34.1 R10.2 U2.5 U3.1 U3.3 U4.1 U4.3 | length 4147.1
  Top Layer w20: U4.3 1428.2,4470 1475,4470 1480,4475 1480,4530 1465,4545 U4.1 ; U3.3 2330.2,4450.2 2345,4465 2345,4515 2335,4525 U3.1
  Top Layer w25: C34.1 1329.57,2570 ; R10.2@1329.57,2631.06 1329.57,2570 ; U2.5@1520,2655.5 1520,2605 1485,2570 1329.57,2570 ; C26.1@2180,4525.43 U3.1@2293.43,4525.43
  Top Layer w30: R10.2 1270,2640 1220,2690 1220,4185 1200,4205 BT1.1 1160,4425 1270.43,4535.43 C28.1 ; U4.1 1319.57,4545 C28.1 ; C26.1@2180,4525.43 2175,4630 2140,4665 1350,4665 1310,4625 C28.1
VREFP: C17.2 C19.2 TP1.0 U1.24 | length 271.5
  Top Layer w10: U1.24 2040.16,3289.84 2045,3285 2045,3217.56 C17.2 C19.2
XTAL0: C39.1 R15.1 U7.33 Y1.1 | length 776.7
  Top Layer w10: U7.33 3412.64,3942.64 3450.43,3980.43 R15.1 3825.43,3980.43 Y1.1 C39.1
pads on no net: P1.11 P1.14 P3.6 P3.7 RS1.1 RS1.4 RS1.6 RS1.7 RS1.8 RS1.9 RS1.10 RS1.11 U1.17 U1.18 U1.27 U1.29 U1.42 U5.7 U5.8 U5.9 U5.10 U6.6 U6.7 U6.8 U6.9 U7.1 U7.2 U7.17 U7.18 U7.19 U7.20 U7.21 U7.23 U7.26 U7.27 U7.28 U7.29 U7.35 U7.37 U7.38 U7.43 U7.46 U7.53 U7.54 U7.55 U7.56 U7.58 U7.59 U7.60

## Polygon pours and split planes (outlines as drawn)
GND on Top Layer "Bottom Layer-No Net" (solid, remove dead copper, pour order 17): 1295,4775 1295,4590 1310,4575 1295,4560 1080,4560 1080,2400 1090,2390 1285,2390 1285,2195 1300,2180 2525,2180 2525,3060 2675,3210 2735,3270 2980,3270 3010,3270 3095,3355 3100,3350 3910,3350 3915,3350 3995,3270 4085,3180 4085,2220 4495,2220 4505,2230 4515,2240 4515,2405 4685,2405 4695,2415 4715,2435 4715,4555 4525,4555 4520,4560 4500,4580 4500,4770
GND on Bottom Layer "Bottom Layer-No Net" (solid, remove dead copper, pour order 19): 1305,4790 1290,4775 1290,4560 1080,4560 1075,4555 1095,4535 1095,2405 1255,2405 1290,2370 1290,2190 4475,2190 4500,2215 4510,2225 4510,2395 4700,2395 4715,2410 4725,2420 4725,4560 4530,4560 4525,4565 4525,4770 4510,4785

## Keep-outs
Keep-Out Layer:
  lines w10: 1065,2160 4745,2160 4745,4800 1280,4800 1065,4800 1065,2160

## Silkscreen, mask and mechanical layers (free items; w line width, h text height)
Top Overlay:
  text "GND" at 3955,4590 h30
  text "CLK" at 2470,3495 h30
  text "GND" at 2795,3160 h30 r270
  text "GND" at 4460,2645 h30
  text "GND" at 4315,2390 h30
  text "C&S  ZJU 2013-7-20" at 1485,2225 h30

## Text inside footprints (layer, text, board x,y; h text height)
BT1: Top Overlay "+" at 1137.28,4299.49 h45.28 r270
P1: Top Overlay "9" at 1440,3180 h50 r90; Top Overlay "1" at 1540,3180 h50 r90; Top Overlay "8" at 1330,3890 h50 r90; Top Overlay "16" at 1330,3950 h50 r90
P3: Top Overlay "8" at 3325,4650 h50; Top Overlay "4" at 3325,4550 h50; Top Overlay "1" at 2885,4550 h50; Top Overlay "5" at 2865,4650 h50
RS1: Top Overlay "6" at 3508.7,2336.46 h59.06 r180; Top Overlay "9" at 3181.54,2336.46 h59.06 r180; Top Overlay "5" at 3127.01,2706.54 h59.06 r180; Top Overlay "1" at 3553.39,2706.54 h59.06 r180
U1: Top Overlay "*" at 1775,3785 h50; Mechanical 1 "47" at 2050,3610 h50; Mechanical 1 "*" at 1771,3782.48 h50
U6: Top Overlay "2" at 4500,3640 h40 r90; Top Overlay "1" at 4590,3650 h40 r90; Top Overlay "9" at 4605,4065 h40 r90; Top Overlay "10" at 4495,4065 h40 r90